# Altium PCB Node Controller v2.PcbDoc
Units mm, origin at the board's own origin, x right, y up, seen from the top; angles counter-clockwise.
Board outline 55 x 37 mm, 2 copper layers (Top Layer, Bottom Layer); 38 components, 27 nets, 150 pads, 137 vias.
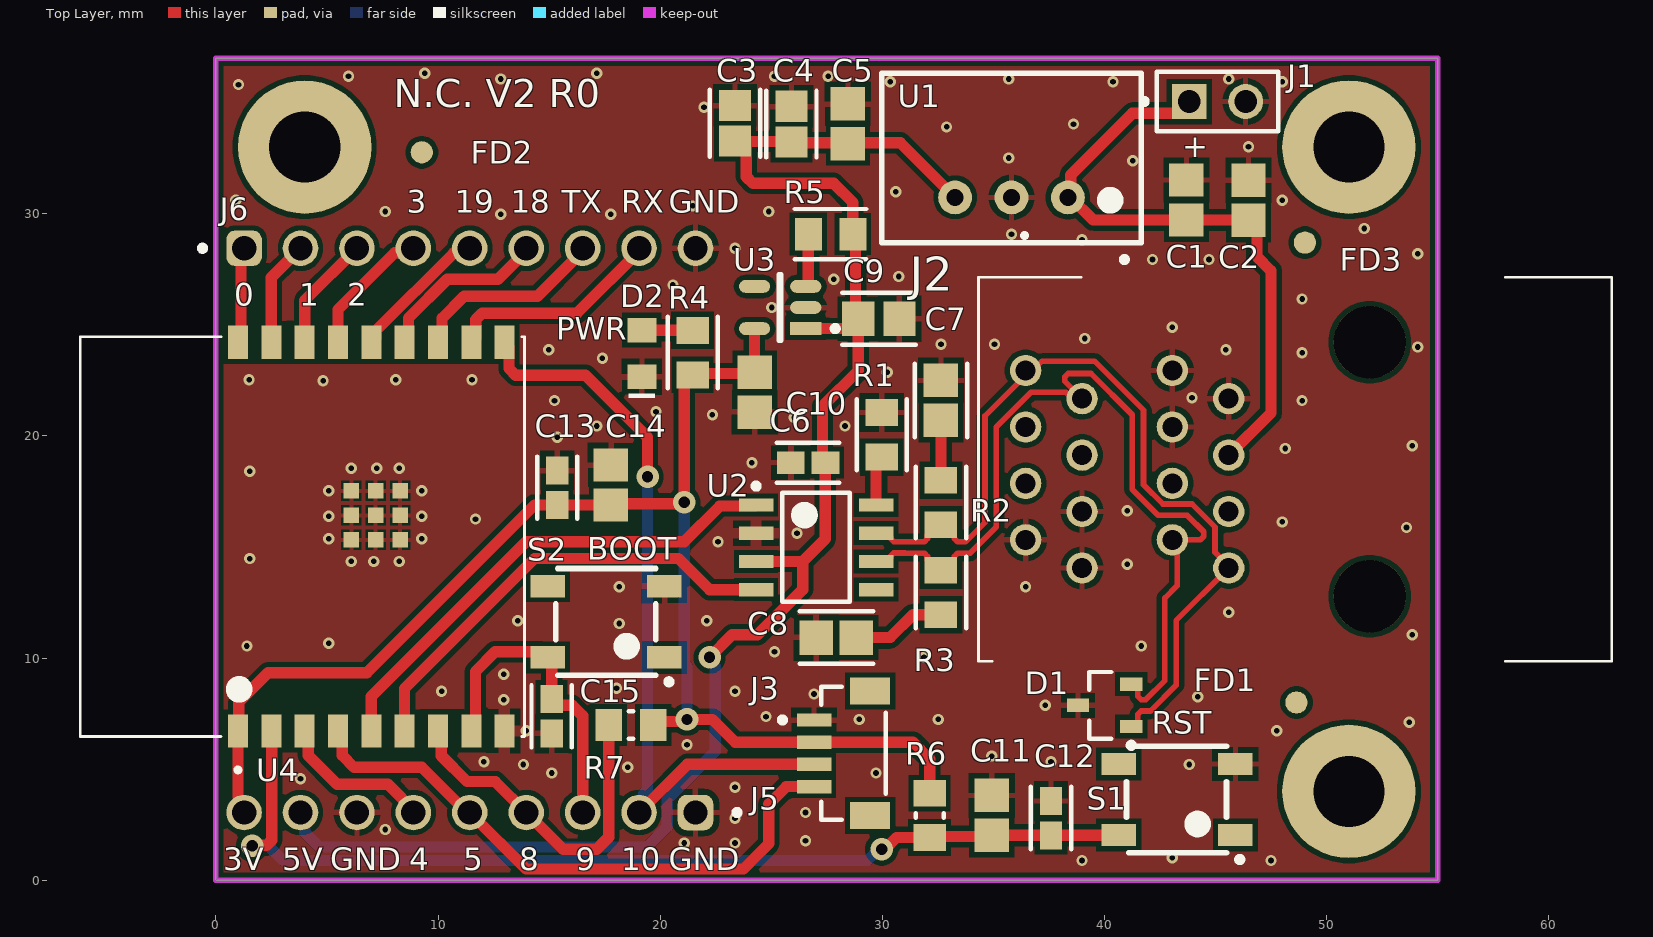
[diagram p0: Top Layer view]
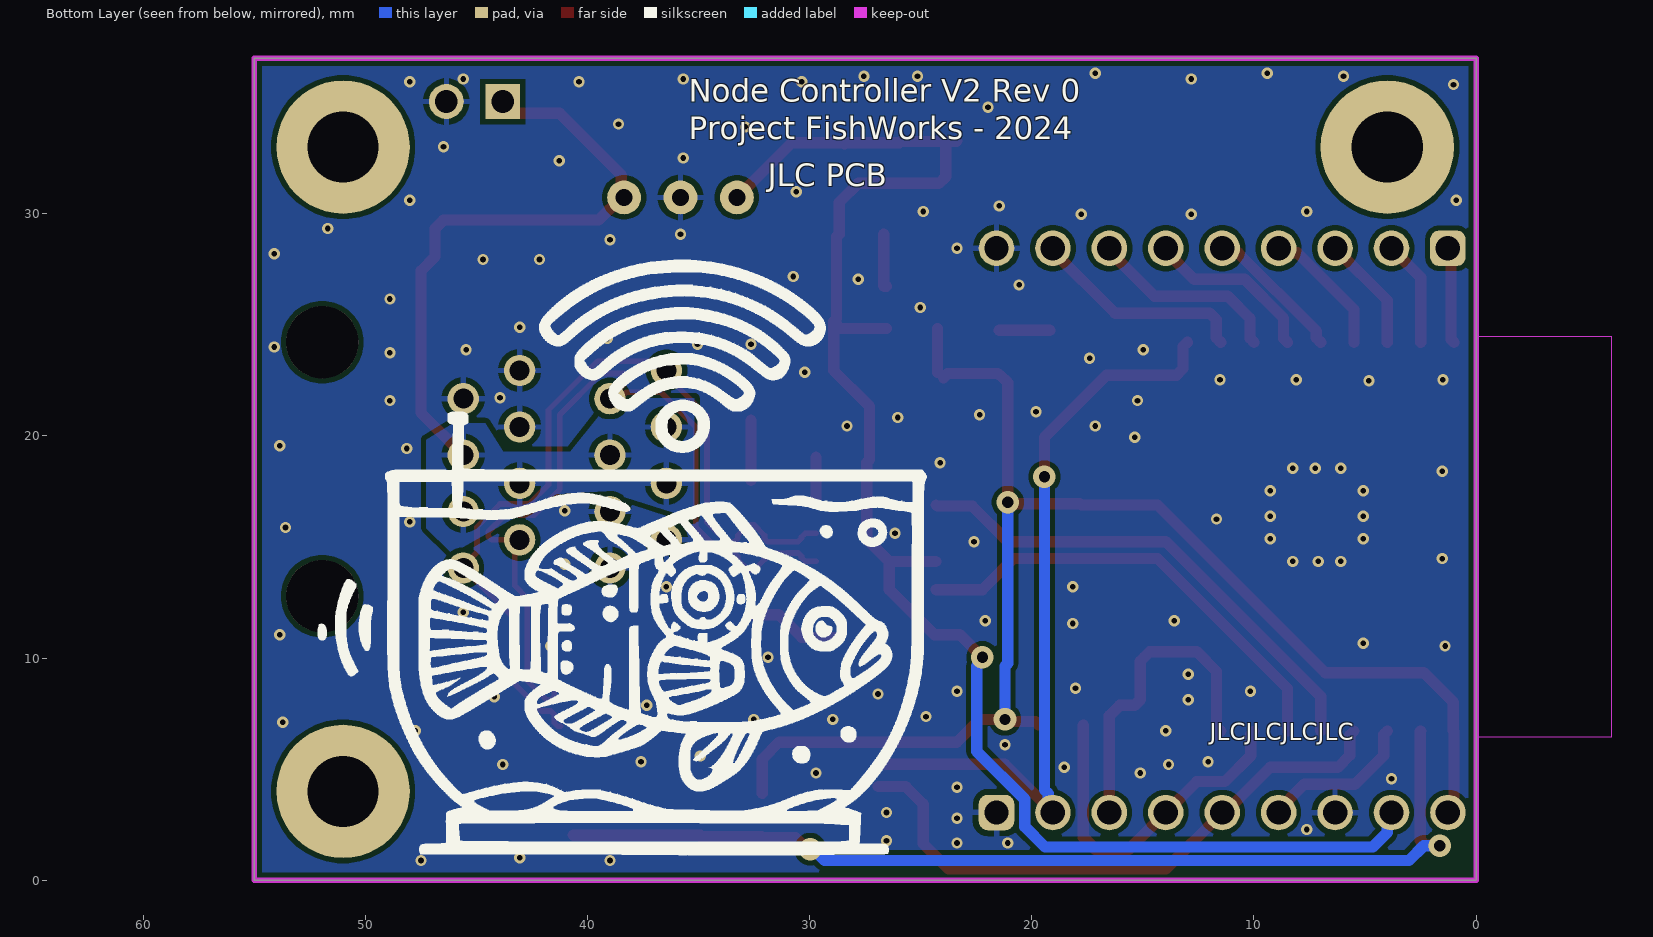
[diagram p1: Bottom Layer view, seen from below]
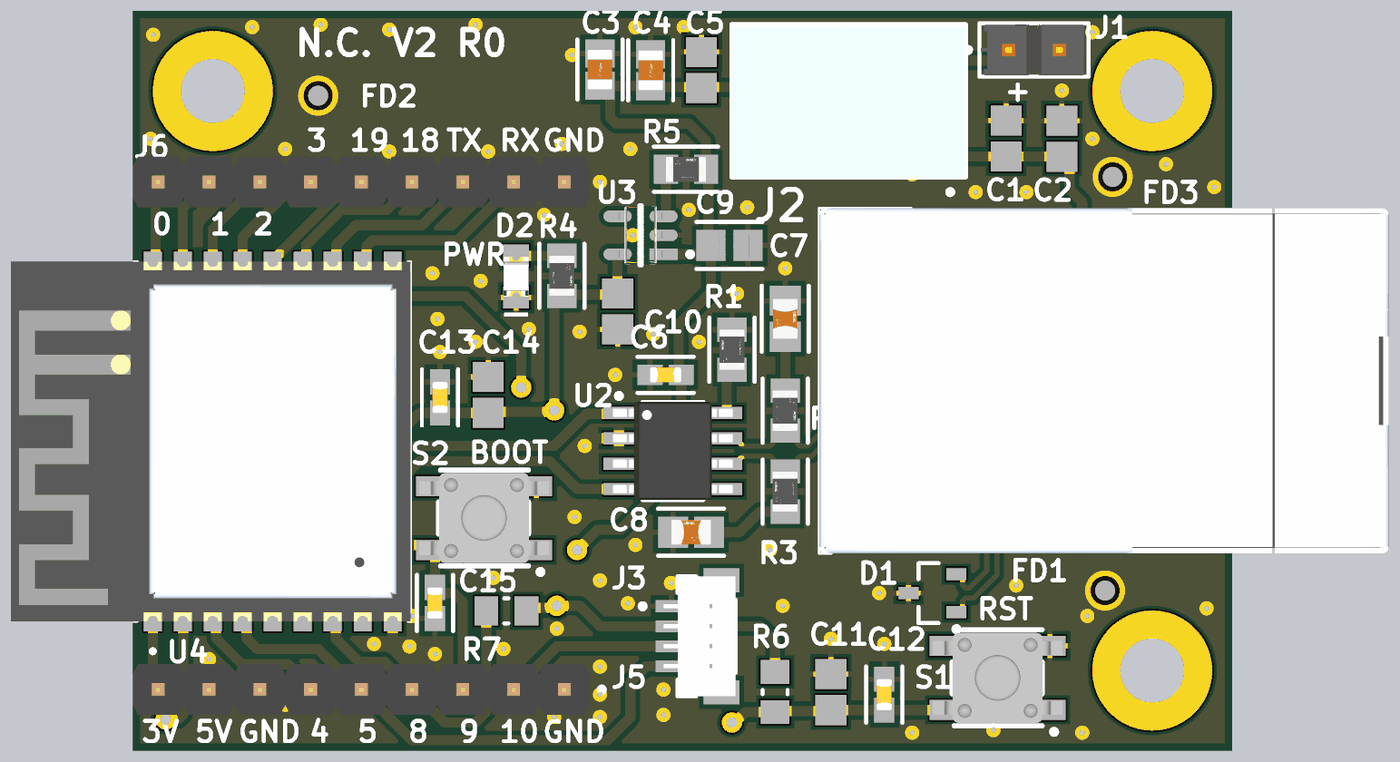
[diagram p2: 3D render of the assembled board from above, using the file's embedded part models]

## Layer stack, top to bottom
Top Solder: solder mask 0.0102, Solder Resist, Dk 3.5
Top Layer: signal copper 0.0356
Dielectric 1: dielectric 0.32, FR-4, Dk 4.8
Bottom Layer: signal copper 0.0356
Bottom Solder: solder mask 0.0102, Solder Resist, Dk 3.5

## Board outline
0,0 0,37 55,37 55,0

## Design rules (kind name [scope] priority, off if disabled: settings)
BoardOutlineClearance [All] p1: gap=0.254 ignorepadtopadclearanceinfootprint=FALSE except(0: Arc-SplitContinuation Track-SplitContinuation SMDPad-SplitContinuation THPad-SplitContinuation Via-SplitContinuation Fill-SplitContinuation Poly-SplitContinuation Region-SplitContinuation Text-SplitContinuation)
Clearance Clearance(DifferentNetOnly) [All] p1: gap=0.229 ignorepadtopadclearanceinfootprint=TRUE except(0.1: Arc-SMDPad Arc-THPad Track-SMDPad Track-THPad; 0.102: Arc-Arc Arc-Track Track-Track; 0.15: SMDPad-SMDPad; 0.28: Arc-Via Arc-Hole Track-Via Track-Hole)
DiffPairsRouting [All] p1: maxlimit=0.762 minlimit=0.178 mostfreqgap=0.254 toplayer_minwidth=0.254 toplayer_maxwidth=0.508 toplayer_prefwidth=0.254 bottomlayer_minwidth=0.254 bottomlayer_maxwidth=0.508 bottomlayer_prefwidth=0.254 maxuncoupledlength=12.7
HoleSize [All] p1: absolutevalues=TRUE maxlimit=6.3 minlimit=0.15 maxpercent=80.000 minpercent=20.000
MinimumSolderMaskSliver [All] p1: minsoldermaskwidth=0.1
PlaneClearance [All] p1: clearance=0.229
PlaneConnect [All] p1: planeconnectstyle=Relief reliefexpansion=0.254 reliefentries=4 reliefconductorwidth=0.254 reliefairgap=0.254
PolygonConnect PolygonConnect_ESP32 [HasFootprint('ESP32-C3-WROOM-02')] p1: thpad.connectstyle=Relief thpad.reliefconductorwidth=0.254 thpad.reliefentries=4 thpad.polygonreliefangle="90 Angle" thpad.airgapwidth=0.254 smdpad.connectstyle=Relief smdpad.reliefconductorwidth=0.203 smdpad.reliefentries=4 smdpad.polygonreliefangle="90 Angle" smdpad.airgapwidth=0.102 via.connectstyle=Relief via.reliefconductorwidth=0.254 via.reliefentries=4 via.polygonreliefangle="90 Angle" via.airgapwidth=0.254
PolygonConnect [All] p2: connectstyle=Relief reliefconductorwidth=0.254 reliefentries=4 polygonreliefangle="90 Angle" airgapwidth=0.254
RoutingVias [All] p1: holewidth=0.508 width=1.016 viastyle="Through Hole" minholewidth=0.254 minwidth=0.508 maxholewidth=0.508 maxwidth=1.016
SolderMaskExpansion [All] p1: expansion=0.102 istentingtop=FALSE
SupplyNets "Schematic Supply Nets_3" [InNet('GND')] p1: voltage=0.000
SupplyNets "Schematic Supply Nets_2" [InNet('+24V')] p2: voltage=0.000
SupplyNets "Schematic Supply Nets_1" [InNet('+5.0V')] p3: voltage=0.000
SupplyNets "Schematic Supply Nets" [InNet('+3.3V')] p4: voltage=0.000
Width [All] p1: maxlimit=4.064 minlimit=0.102 preferedwidth=0.508 minimp=50.000000 maximp=50.000000 favimp=50.000000
25 further rules are at their usual default settings.

## Classes and differential pairs
differential pair CAN: +CAN_P -CAN_N

## Components (designator, comment, footprint, x,y, rotation, side; value= is the part's Value field where it differs from the comment)
C1 "10uF" CAPC2013X145X50ML20T25 43.688,30.618 r270 top
C2 "10uF" CAPC2013X145X50ML20T25 46.482,30.607 r270 top
C3 "22uF" FP-GMC21R-IPC_B 23.368,34.074 r90 top
C4 "22uF" FP-GMC21R-IPC_B 25.908,34.036 r90 top
C5 "10uF" CAPC2013X145X50ML20T25 28.448,34.047 r270 top
C6 "0.1uF" FP-CC0603-DA-IPC_A 26.655,18.796 r180 top value=100nF
C7 "560pF" FP-CC0805-0_85-IPC_A 32.639,21.602 r90 top
C8 "560pF" FP-CC0805-0_85-IPC_A 27.928,10.922 r180 top
C9 "1uF" FP-CL21-IPC_A 29.845,25.273 r0 top value=1µF
C10 "10uF" CAPC2013X145X50ML20T25 24.257,21.971 r90 top
C11 "10uF" CAPC2013X145X50ML20T25 34.925,2.921 r270 top
C12 "0.1uF" FP-CC0603-DA-IPC_A 37.592,2.794 r270 top value=100nF
C13 "0.1uF" FP-CC0603-DA-IPC_A 15.367,17.668 r270 top value=100nF
C14 "10uF" CAPC2013X145X50ML20T25 17.78,17.791 r270 top
C15 "0.1uF" FP-CC0603-DA-IPC_A 15.113,7.381 r90 top value=100nF
D1 "DESD1CAN2SOQ-7" SOT95P245X110-3N 40.005,7.874 r180 top
D2 "150080VS75000" WL-SMCW_0805_150080xx75000 19.177,23.715 r90 top
FD1 "JLC FID1X2R" FID1X2R#1 48.641,8.001 r90 top
FD2 "JLC FID1X2R" FID1X2R#2 9.271,33.401 r90 top
FD3 "JLC FID1X2R" FID1X2R#3 49.022,28.702 r90 top
J1 "TSW-102-07-G-S" FP-TSW-102-07-G-S-MFG 45.085,35.052 r0 top
J2 "E5908-0T0343-L" E5908-0T0343-L-Footprint-1 51.943,18.5 r90 top
J3 "BM04B-SRSS-TBT(LF)(SN)" FP-BM04B-SRSS-TBT_LF_SN-MFG 28.702,5.715 r270 top
J5 "61300911121" 61300911121 11.43,3.048 r180 top
J6 "61300911121" 61300911121 11.43,28.448 r0 top
R1 "4.7k" FP-RT0805-IPC_A 29.972,20.052 r90 top value=4.7kR
R2 "100" FP-RT0805-0_6-IPC_A 32.639,17.004 r270 top value=100R
R3 "100" FP-RT0805-0_6-IPC_A 32.639,12.954 r90 top value=100R
R4 "1.5k" FP-RT0805-IPC_A 21.463,23.749 r270 top value=1.5kR
R5 "100k" FP-RT0805-IPC_A 27.672,29.083 r0 top value=100kR
R6 "10k" RESC2013X60X35ML10T20 32.131,2.921 r90 top value=10kR
R7 "10k" RESC2013X60X35ML10T20 18.685,6.985 r0 top value=10kR
S1 "PTS647SN50SMTR2LFS" PTS647SN50SMTR2LFS-Footprint-1 45.89,2.032 r180 top
S2 "PTS647SN50SMTR2LFS" PTS647SN50SMTR2LFS-Footprint-1 20.193,10.033 r180 top
U1 "TR10S05" TR10S05-Footprint-1 38.354,30.734 r180 top
U2 "MCP2551-I/SN" MCHP-SN8_V 27.018,14.986 r0 top
U3 "AP2112K-3.3TRG1" FP-SOT25-IPC_B 25.4,25.781 r180 top
U4 "ESP32-C3-WROOM-02" ESP32-C3-WROOM-02 0.996,6.716 r90 top

## Footprints (in the part's own frame and the unit in brackets; to place one, negate y for a bottom-side part, rotate by r counter-clockwise, add the part's x,y. Pads: shape width x height; smd on the part's side, far side on the other; paste and mask are expansions set on the pad)
61300911121 [mm] "Pin Header, pitch 2.54 mm, THT, Vertical, single row, 9p"
  rrect50% 1.6x1.6 hole 1.1: 1(-10.16,0)
  round 1.6 hole 1.1: 2(-7.62,0) 3(-5.08,0) 4(-2.54,0) 5(0,0) 6(2.54,0) 7(5.08,0) 8(7.62,0) 9(10.16,0)
  silkscreen extent -12.15,-0.12 -11.91,0.12, body extent -11.43,-1.27 11.43,1.27, height 8.57
CAPC2013X145X50ML20T25 [mm] "Chip Capacitor, 2-Leads, Body 2.00x1.25mm, IPC Low Density"
  rect 1.5x1.55 smd: 1(-0.9,0) 2(0.9,0)
  body extent -1.1,-0.72 1.1,0.72, height 1.45
E5908-0T0343-L-Footprint-1 [mm]
  round 1.408 hole 0.9: 1B(-4.445,6.35) 1T(4.445,15.49) 2B(-3.175,8.89) 2T(3.175,12.95) 3B(-1.905,6.35) 3T(1.905,15.49) 4B(-0.635,8.89) 4T(0.635,12.95) 5B(0.635,6.35) 5T(-0.635,15.49) 6B(1.905,8.89) 6T(-1.905,12.95) 7B(3.175,6.35) 7T(-3.175,15.49) 8B(4.445,8.89) 8T(-4.445,12.95)
  round 3.25 hole 3.25 unplated: ""(-5.715,0) ""(5.715,0)
  silkscreen extent -8.64,-10.89 10.62,17.61, body extent -8.64,-10.89 8.64,17.61, height 25.3
ESP32-C3-WROOM-02 [mm]
  rect 1.5x0.9 smd: 1(0,0) 2(0,-1.5) 3(0,-3) 4(0,-4.5) 5(0,-6) 6(0,-7.5) 7(0,-9) 8(0,-10.5) 9(0,-12) 10(17.5,-12) 11(17.5,-10.5) 12(17.5,-9) 13(17.5,-7.5) 14(17.5,-6) 15(17.5,-4.5) 16(17.5,-3) 17(17.5,-1.5) 18(17.5,0)
  rect 0.7x0.7 smd: 19(8.61,-7.3) 19(8.61,-6.2) 19(8.61,-5.1) 19(9.71,-7.3) 19(9.71,-6.2) 19(9.71,-5.1) 19(10.81,-7.3) 19(10.81,-6.2) 19(10.81,-5.1)
  Keep-Out Layer region: 17.75,1.1 -0.25,1.1 -0.25,7.1 17.75,7.1
  Keep-Out Layer region: 17.75,1.1 -0.25,1.1 -0.25,7.1 17.75,7.1
  silkscreen extent -1.85,-12.9 17.75,7.1, body extent -0.25,-12.9 17.75,7.1, height 3.35
FID1X2R#1 [mm] "Fiducial - Round 1x2mm"
  round 1 smd mask-2539.97: 0(0,0)
FID1X2R#2 [mm] "Fiducial - Round 1x2mm"
  round 1 smd mask-2539.97: 0(-0.635,0)
FID1X2R#3 [mm] "Fiducial - Round 1x2mm"
  round 1 smd mask-2539.97: ""(0,0)
FP-BM04B-SRSS-TBT_LF_SN-MFG [mm]
  rect 0.6x1.55 smd paste+0 mask+0: 1(-1.5,-1.775) 2(-0.5,-1.775) 3(0.5,-1.775) 4(1.5,-1.775)
  rect 1.2x1.8 smd paste+0 mask+0: 5(-2.8,0.75) 6(2.8,0.75)
  silkscreen extent -3,-3.32 3,1.45, body extent -3.5,-2.65 3.5,1.75, height 0.25
FP-CC0603-DA-IPC_A [mm]
  rect 1.258x1.012 smd paste+0 mask+0: 1(-0.777,0) 2(0.777,0)
  silkscreen extent -1.41,-0.91 1.41,0.91, body extent -1.91,-1.01 1.91,1.01, height 0.25
FP-CC0805-0_85-IPC_A [mm]
  rect 1.505x1.556 smd paste+0 mask+0: 1(-0.901,0) 2(0.901,0)
  silkscreen extent -1.65,-1.18 1.65,1.18, body extent -2.15,-1.28 2.15,1.28, height 0.25
FP-CL21-IPC_A [mm]
  rect 1.455x1.556 smd paste+0 mask+0: 1(-0.926,0) 2(0.926,0)
  silkscreen extent -1.65,-1.18 1.65,1.18, body extent -2.15,-1.28 2.15,1.28, height 0.25
FP-GMC21R-IPC_B [mm]
  rect 1.403x1.456 smd paste+0 mask+0: 1(-0.8,0) 2(0.8,0)
  silkscreen extent -1.5,-1.13 1.5,1.13, body extent -1.75,-0.98 1.75,0.98, height 0.25
FP-RT0805-0_6-IPC_A [mm]
  rect 1.208x1.462 smd paste+0 mask+0: 1(-1.002,0) 2(1.002,0)
  silkscreen extent -1.61,-1.13 1.61,1.13, body extent -2.11,-1.23 2.11,1.23, height 0.25
FP-RT0805-IPC_A [mm]
  rect 1.208x1.462 smd paste+0 mask+0: 1(-1.002,0) 2(1.002,0)
  silkscreen extent -1.61,-1.13 1.61,1.13, body extent -2.11,-1.23 2.11,1.23, height 0.25
FP-SOT25-IPC_B [mm]
  rect 1.407x0.576 smd paste+0 mask+0: 1(-1.151,0.95)
  rrect100% 1.407x0.576 smd paste+0 mask+0: 2(-1.151,0) 3(-1.151,-0.95) 4(1.151,-0.95) 5(1.151,0.95)
  silkscreen extent -2.6,-1.5 0.05,1.5, body extent -2.1,-1.75 2.1,1.75, height 0.25
FP-TSW-102-07-G-S-MFG [mm]
  rect 1.57x1.57 hole 1.02 paste-2539.97 mask+0: 1(-1.27,0)
  round 1.57 hole 1.02 paste-2539.97 mask+0: 2(1.27,0)
  silkscreen extent -3.42,-1.34 2.73,1.34, body extent -2.83,-1.44 2.83,1.44, height 0.25
MCHP-SN8_V [mm] "SOIC, 8-Leads, Body 4.9x3.9mm, Pitch 1.27mm"
  rect 1.55x0.6 smd: 1(-2.7,1.905) 2(-2.7,0.635) 3(-2.7,-0.635) 4(-2.7,-1.905) 5(2.7,-1.905) 6(2.7,-0.635) 7(2.7,0.635) 8(2.7,1.905)
  silkscreen extent -2.82,-2.45 1.53,2.88, body extent -3,-2.45 3,2.45, height 1.75
PTS647SN50SMTR2LFS-Footprint-1 [mm]
  rect 1.55x1 smd: 1(0,0) 2(5.25,0) 3(0,-3.2) 4(5.25,-3.2)
  silkscreen extent -0.33,-4 4.9,1.22, body extent -0.63,-3.85 5.88,0.65, height 5
RESC2013X60X35ML10T20 [mm] "Chip Resistor, 2-Leads, Body 2.00x1.25mm, IPC Low Density"
  rect 1.2x1.45 smd: 1(-1,0) 2(1,0)
  silkscreen extent -0.1,-0.62 0.1,0.62, body extent -1.05,-0.67 1.05,0.67, height 0.6
SOT95P245X110-3N [mm] "SOT23, 3-Leads, Body 2.90x2.45mm, Pitch 0.95mm, IPC Medium Density"
  rect 1x0.6 smd: 1(-1.2,0.95) 2(-1.2,-0.95) 3(1.2,0)
  silkscreen extent -1.33,-1.5 0.7,1.92, body extent -0.7,-1.5 0.7,1.5, height 1.1
TR10S05-Footprint-1 [mil]
  round 60 hole 30: 1(0,0) 2(100,0) 3(200,0)
  silkscreen extent -130,-220 330,115, body extent -130,-215 330,80, height 400
WL-SMCW_0805_150080xx75000 [mm] "SMD Mono-color Chip LED, body 2.0x1.25mm"
  rect 1.1x1.3 smd: 1(-1.05,0) 2(1.05,0)
  silkscreen extent -2,-0.6 -1.8,0.6, body extent -1,-0.63 1,0.62, height 0.7

## Part data
C1 C2 C5 C10 C11 C14: library part CMP-00010-1, "Ceramic Capacitor, Multilayer, Ceramic, 10V, 80% +Tol, 20% -Tol, Y5V, -82/+22% TC, 10uF, Surface Mount, 0805", Capacitor Type=Ceramic, Case/Package=0805, Max Operating Temperature=85°C, Min Operating Temperature=-30°C, Package Shape=Rectangular, Package Style=SMTMeter, Rated DC Voltage (URdc)=10V, Temperature Characteristics Code=Y5V, Tolerance  (fill in as +-)=20%, Tolerance (fill in as +-)=80%, Dielectric Material=Ceramic, Height=1.25mm, JESD-609 Code=e3, Length=2mm, Mounting Technology="Surface Mount", Multilayer=Yes, Packaging="Tape and Reel", Pins=2, Reach SVHC Compliant=Yes, RoHS Compliant=Yes, Terminal Finish=Nickel, Termination=Wraparound, Width=1.25mm
C3 C4: library part CMP-00027-1, "Ceramic Capacitor, Multilayer, Ceramic, 35V, 20% +Tol, 20% -Tol, X5R, 15% TC, 22uF, Surface Mount, 0805"
C6 C12 C13 C15: library part CMP-00002-1, "Ceramic Capacitor, Multilayer, Ceramic, 50V, 10% +Tol, 10% -Tol, X7R, 15% TC, 0.1uF, Surface Mount, 0603", Capacitor Type=Ceramic, Case/Package=0603, Max Operating Temperature=125°C, Min Operating Temperature=-55°C, Package Shape=Rectangular, Package Style=SMTMeter, Rated DC Voltage (URdc)=50V, Temperature Characteristics Code=X7R, Tolerance  (fill in as +-)=10%, Dielectric Material=Ceramic, Height=0.8mm, JESD-609 Code=e3, Length=1.6mm, Mounting Technology="Surface Mount", Multilayer=Yes, Packaging="Tape and Reel", Pins=2, Reach SVHC Compliant=Yes, RoHS Compliant=Yes, Terminal Finish=Nickel, Termination=Wraparound, Tolerance (fill in as +-)=10%, Width=0.8mm
C7 C8: library part CMP-00033-1, "Ceramic Capacitor, Multilayer, Ceramic, 50V, 10% +Tol, 10% -Tol, X7R, 15% TC, 0.00056uF, Surface Mount, 0805", Capacitor Type=Ceramic, Case/Package=0805, Max Operating Temperature=125°C, Min Operating Temperature=-55°C, Package Shape=Rectangular, Rated DC Voltage (URdc)=50V, Temperature Characteristics Code=X7R, Tolerance  (fill in as +-)=10%, Dielectric Material=Ceramic, JESD-609 Code=e3, Mounting Technology="Surface Mount", Multilayer=Yes, Packaging="Tape and Reel", Pins=2, Reach SVHC Compliant=Yes, RoHS Compliant=Yes, Terminal Finish=Nickel, Termination=Wraparound, Tolerance (fill in as +-)=10%
C9: library part CMP-00019-1, "Ceramic Capacitor, Multilayer, Ceramic, 50V, 10% +Tol, 10% -Tol, X7R, 15% TC, 1uF, Surface Mount, 0805", Capacitor Type=Ceramic, Case/Package=0805, Max Operating Temperature=125°C, Min Operating Temperature=-55°C, Package Shape=Rectangular, Package Style=SMTMeter, Rated DC Voltage (URdc)=50V, Temperature Characteristics Code=X7R, Tolerance  (fill in as +-)=10%, Dielectric Material=Ceramic, Height=1.35mm, JESD-609 Code=e3, Length=2mm, Mounting Technology="Surface Mount", Multilayer=Yes, Packaging="Tape and Reel", Pins=2, Reach SVHC Compliant=Yes, RoHS Compliant=Yes, Terminal Finish=Nickel, Termination=Wraparound, Tolerance (fill in as +-)=10%, Width=1.25mm
D1: library part CMP-00024-2, "Trans Voltage Suppressor Diode, 200W, 24V V(RWM), Bidirectional, 2 Element, Silicon", Max Breakdown Voltage=30.3V, Max Operating Temperature=150°C, Max Power Dissipation=300mW, Min Breakdown Voltage=25.4V, Min Operating Temperature=-65°C, Non-rep Peak Rev Power Dis-Max=200W, Package Body Material=Plastic, Package Shape=Rectangular, Package Style="SMALL OUTLINEMeter", Peak Reflow Temperature (Cel)=260°C, Rep Pk Reverse Voltage-Max=24V, Time @ Peak Reflow Temperature-Max (s)=30s, Additional Feature="HIGH RELIABILITY", Diode Element Material=SILICON, Diode Type="TRANS VOLTAGE SUPPRESSOR", JESD-30 Code=R-PDSO-G3, JESD-609 Code=e3, Moisture Sensitivity Level=1, Number of Elements=2, Pins=3, Polarity=Bidirectional, Reach SVHC Compliant=Yes, Reference Standard=AEC-Q101, RoHS Compliant=Yes, Surface Mount=Yes, Technology=AVALANCHE, Terminal Finish=Tin, Terminal Form="Gull Wing", Terminal Position=DUAL
D2: library part CMP-00021-1, "Single Color LED, Bright Green, Water Clear, 1.4mm", Color=Green, Forward Current=30mA, Max Operating Temperature=85°C, Min Operating Temperature=-40°C, Channels=1, Lens Style="WATER CLEAR", Luminous Intensity-Nom=40mcd, Mounting Technology="Surface Mount", Optoelectronic Device Type="SINGLE COLOR LED", Overall Height=0.7mm, Packaging="Tape and Reel", Pins=2, Reach SVHC Compliant=Yes, RoHS Compliant=Yes, Shape=Rectangular, Size=1.4mm, Terminal Pitch=2.1mm, Viewing Angle=140°
FD1 FD2 FD3: library part CMP-00028-00011-4, "Fiducial - Round 1x2mm", Pins=0
J1: library part CMP-00020-2, "Board Connector, 2 Contact(s), 1 Row(s), Male, Straight, 0.1 inch Pitch, Solder Terminal, Black Insulator", Flammability Rating="UL94 V-0", Insulation Color=Black, Additional Feature=E.L.P., Body Breadth=0.1inch, Body Depth=0.1inch, Body/Shell Style=RECEPTACLE, Connector Type="BOARD CONNECTOR", Contact Finish - Mating="GOLD (10) OVER NICKEL (50)", Contact Finish - Termination="Gold (Au) - with Nickel (Ni) barrier", Contact Gender=Male, Contact Material=Bronze, Contact Pattern=RECTANGULAR, Contact Style="SQ PIN-SKT", DIN Conformance=No, Filter Feature=No, IEC Conformance=No, Insulation Material=Glass, JESD-609 Code=e4, Mating Contact Pitch=0.1inch, Mating Information="MULTIPLE MATING PARTS AVAILABLE", MIL Conformance=No, Mixed Contacts=No, Mounting Style=STRAIGHT, Mounting Technology=Board, Number Of Connectors=1, Number of Contacts=2, Number Of PCB Rows=1, Number of Rows Loaded=1, Option="General Purpose", PCB Contact Pattern=RECTANGULAR, Plating Thickness=10uin, Reach SVHC Compliant=Yes, Reference Standard=UL, Reliability=COMMERCIAL, RoHS Compliant=Yes, Terminal Length=0.1inch, Terminal Pitch=2.54mm, Termination=Solder
J2: library part CMP-002-00077-7, "Telecom and Datacom Connector, 16 Contact(s), Female, Right Angle, Solder Terminal, Jack", Flammability Rating="UL94 V-0", Manufacturer Series=E5908, Body/Shell Style=JACK, Connector Type="TELECOM AND DATACOM CONNECTOR", Contact Finish - Mating="GOLD (15) OVER NICKEL", Contact Finish - Termination="GOLD (15) OVER NICKEL", Contact Gender=Female, DIN Conformance=No, Empty Shell=No, Filter Feature=No, IEC Conformance=No, Insulation Material=Glass, JESD-609 Code=e4, MIL Conformance=No, Mixed Contacts=No, Mounting Style="RIGHT ANGLE", Mounting Technology=Board, Number of Contacts=16, Option="General Purpose", Reach SVHC Compliant=Yes, RoHS Compliant=Yes, Shell Material=Glass, Termination=Solder
J3: library part CMP-002-00076-4, "1.0mm Pitch, Ultra-Compact, Low Profile Design, Interchangeable Shrouded Header"
J5 J6: library part CMP-00023-4, "Board Connector, 9 Contact(s), 1 Row(s), Male, Straight, 0.1 inch Pitch, Solder Terminal, Locking, Black Insulator, Plug", Contact Resistance=20mR, Dielectric Withstanding Voltage (AC)=500V, Insulation Color=Black, Insulation Resistance=1GR, Max Operating Temperature=125°C, Min Operating Temperature=-40°C, Rated Current (Signal)=3A, Body Breadth=0.1inch, Body Depth=0.1inch, Body Length=0.9inch, Body/Shell Style=PLUG, Connector Type="BOARD CONNECTOR", Contact Finish - Mating=GOLD, Contact Finish - Termination="Gold (Au) - with Nickel (Ni) barrier", Contact Gender=Male, Contact Material="Copper Alloy", Contact Pattern=RECTANGULAR, Contact Style="SQ PIN-SKT", Insulation Material=Polybutylene, JESD-609 Code=e4, Mating Contact Pitch=0.1inch, Mounting Option 1=LOCKING, Mounting Style=STRAIGHT, Mounting Technology=Board, Number Of Connectors=1, Number of Contacts=9, Number of Rows Loaded=1, PCB Contact Pattern=RECTANGULAR, Reach SVHC Compliant=Yes, Reference Standard=UL, Reliability=COMMERCIAL, RoHS Compliant=Yes, Terminal Length=0.118inch, Terminal Pitch=2.54mm, Termination=Solder
R1: library part CMP-00015-1, "Fixed Resistor, Thin Film, 0.125W, 4700ohm, 150V, 1% +/-Tol, 50ppm/Cel, Surface Mount, 0805", Case/Package=0805, Max Operating Temperature=155°C, Min Operating Temperature=-55°C, Package Height=0.5mm, Package Length=2mm, Package Style=SMTMeter, Package Width=1.25mm, Power=125mW, Rated Temperature=70°C, Resistor Type="FIXED RESISTOR", Temperature Coefficient=50ppm/°C, Tolerance=1%, Working Voltage=150V, Additional Feature="HIGH PRECISION", Construction=Chip, Mounting Technology="Surface Mount", Packaging="Tape and Reel", Pins=2, Reach SVHC Compliant=Yes, RoHS Compliant=Yes, Technology="THIN FILM", Termination=Wraparound
R2 R3: library part CMP-00016-1, "Fixed Resistor, Thin Film, 0.125W, 100ohm, 150V, 0.1% +/-Tol, 25ppm/Cel, Surface Mount, 0805", Case/Package=0805, Max Operating Temperature=155°C, Min Operating Temperature=-55°C, Package Height=0.5mm, Package Length=2mm, Package Style=SMTMeter, Package Width=1.25mm, Power=125mW, Rated Temperature=70°C, Resistor Type="FIXED RESISTOR", Temperature Coefficient=25ppm/°C, Tolerance=0.1%, Working Voltage=150V, Additional Feature="HIGH PRECISION", Construction=Chip, Mounting Technology="Surface Mount", Packaging="Tape and Reel", Pins=2, Reach SVHC Compliant=Yes, RoHS Compliant=Yes, Technology="THIN FILM", Termination=Wraparound
R4: library part CMP-00013-1, "Fixed Resistor, Thin Film, 0.125W, 1500ohm, 150V, 1% +/-Tol, 50ppm/Cel, Surface Mount, 0805", Case/Package=0805, Max Operating Temperature=155°C, Min Operating Temperature=-55°C, Package Height=0.5mm, Package Length=2mm, Package Style=SMTMeter, Package Width=1.25mm, Power=125mW, Rated Temperature=70°C, Resistor Type="FIXED RESISTOR", Temperature Coefficient=50ppm/°C, Tolerance=1%, Working Voltage=150V, Additional Feature="HIGH PRECISION", Construction=Chip, Mounting Technology="Surface Mount", Packaging="Tape and Reel", Pins=2, Reach SVHC Compliant=Yes, RoHS Compliant=Yes, Technology="THIN FILM", Termination=Wraparound
R5: library part CMP-00014-1, "Fixed Resistor, Thin Film, 0.125W, 100000ohm, 150V, 1% +/-Tol, 50ppm/Cel, Surface Mount, 0805", Case/Package=0805, Max Operating Temperature=155°C, Min Operating Temperature=-55°C, Package Height=0.5mm, Package Length=2mm, Package Style=SMTMeter, Package Width=1.25mm, Power=125mW, Rated Temperature=70°C, Resistor Type="FIXED RESISTOR", Temperature Coefficient=50ppm/°C, Tolerance=1%, Working Voltage=150V, Additional Feature="HIGH PRECISION", Construction=Chip, Mounting Technology="Surface Mount", Packaging="Tape and Reel", Pins=2, Reach SVHC Compliant=Yes, RoHS Compliant=Yes, Technology="THIN FILM", Termination=Wraparound
R6 R7: library part CMP-00012-1, "Fixed Resistor, Metal Glaze/thick Film, 0.125W, 10000ohm, 150V, 1% +/-Tol, 100ppm/Cel, Surface Mount, 0805", Case/Package=0805, Max Operating Temperature=155°C, Min Operating Temperature=-55°C, Package Height=0.5mm, Package Length=2mm, Package Shape=Rectangular, Package Style=SMTMeter, Package Width=1.25mm, Power=125mW, Rated Temperature=70°C, Resistor Type="FIXED RESISTOR", Temperature Coefficient=100ppm/°C, Tolerance=1%, Working Voltage=150V, Additional Feature="LASER TRIMMABLE", Construction=Chip, JESD-609 Code=e3, Mounting Technology="Surface Mount", Packaging="Tape and Reel", Pins=2, Reach SVHC Compliant=Yes, RoHS Compliant=Yes, Technology="METAL GLAZE/THICK FILM", Terminal Finish=Nickel, Termination=Wraparound
S1 S2: library part CMP-011-00013-3, "Keypad Switch, 1 Switches, SPST, Momentary-tactile, 0.05A, 12VDC, 1.47N, Solder Terminal, Surface Mount-straight", RoHS Compliant=Yes
U1: library part CMP-019-00050-2, "DC-DC Regulated Power Supply Module", Reach SVHC Compliant=Yes, RoHS Compliant=Yes, Throw Configuration="DC-DC REGULATED POWER SUPPLY MODULE"
U2: library part CMP-015-00008-2, "CAN Transceiver, 1-Trnsvr, PDSO8", Case/Package=SOP, Max Operating Temperature=85°C, Max Supply Current=75uA, Min Operating Temperature=-40°C, Nominal Supply Voltage=5V, Package Body Material=Plastic, Package Equivalence Code=SOP8,.25, Package Shape=Rectangular, Package Style="SMALL OUTLINEMeter", Peak Reflow Temperature (Cel)=260°C, Temperature Grade=INDUSTRIAL, Time @ Peak Reflow Temperature-Max (s)=40s, Channels=1, Data Rate=1000Mbps, Height - Seated (Max)=1.75mm, JESD-30 Code=R-PDSO-G8, JESD-609 Code=e3, Length=4.9mm, Moisture Sensitivity Level=1, Number of Transceivers=1, Pins=8, Power Supplies=5V, Qualification Status="Not Qualified", Reach SVHC Compliant=Yes, RoHS Compliant=Yes, Surface Mount=Yes, Technology=CMOS, Telecom IC Type="INTERFACE CIRCUIT", Terminal Finish=Tin, Terminal Form="Gull Wing", Terminal Pitch=1.27mm, Terminal Position=DUAL, Width=3.9mm
U3: library part CMP-019-00049-4, "Fixed Positive LDO Regulator, 3.3V, 0.4V Dropout, CMOS, PDSO5", Case/Package=LSSOP, Max Operating Temperature=85°C, Max Supply Voltage=6V, Min Operating Temperature=-40°C, Pins=5, RoHS Compliant=Yes
U4: library part CMP-005-00015-5, Datasheet=https://www.espressif.com/sites/default/files/documentation/esp32-c3-wroom-02_datasheet_en.pdf, Design Item ID=ESP32-C3-WROOM-02, ki_description="ESP32-C3-WROOM-02 is a general-purpose Wi-Fi and Bluetooth LE module. This module features a rich set of peripherals and high performance, which makes it an ideal choice for smart home, industrial automation, health care, consumer electronics, etc.", ki_keywords="esp32-c3 module", Reference=U, Source=NodeController.SCHLIB

## Free pads (board coordinates)
  round 6 hole 3.2: 3(4,33) 3(51,4) 3(51,33)

## Via types
v1: diameter 0.508, hole 0.254, Top Layer to Bottom Layer, 131 vias
v2: diameter 1.016, hole 0.508, Top Layer to Bottom Layer, 6 vias

## Nets (pads, with @x,y where several pads share a name; then routed paths per layer and width w, separated by ;. In a path a pad name is that pad's centre, name@x,y a point inside that pad or via, vN(x,y) a via of type N, cw(c..) or ccw(c..) an arc to the next point about the centre after c; other vN are vias at no path point)
+3.3V: C10.2 C13.2 C14.2 J3.2 J5.9 R4.2 R6.2 R7.2 U3.5 U4.1 | length 64.1
  Top Layer w0.508: J5.9@1.397,3.048 1.397,3.343 0.996,3.745 U4.1 1.026,6.746 1.026,8.011 2.359,9.344 6.804,9.344 14.351,16.891 C13.2 C14.2 17.834,16.945 21.009,16.945 v2(21.082,17.018) 21.082,22.397 21.432,22.747 R4.2 21.525,22.809 23.778,22.809 C10.2@23.974,22.613 ; R7.2 19.842,7.142 21.112,7.142 v2(21.209,7.239) 22.352,7.239 23.376,6.215 J3.2 31.377,6.215 32.131,5.461 R6.2 ; C10.2@24.242,22.871 24.242,24.824 U3.5
  Bottom Layer w0.508: v2(21.082,17.018) 21.082,9.762 21.209,9.635 v2(21.209,7.239)
+5.0V: C3.1 C4.1 C5.2 C6.1 C9.1 J5.8 R5.2 U1.3 U2.3 U3.1 | length 73.1
  Top Layer w0.508: v2(22.225,10.033) 23.241,11.049 24.384,11.049 26.417,13.082 26.417,14.352 ; C3.1 23.387,33.255 C3.1@23.876,33.255 ; U2.3 U2.3 26.417,14.352 ; C4.1 25.889,33.255 C3.1@23.876,33.255 ; C4.1@25.971,33.191 28.404,33.191 C5.2 ; U3.1 28.604,24.831 28.919,25.146 28.919,22.95 27.305,21.336 27.305,18.923 C6.1 27.432,15.367 26.417,14.352 ; C5.2@28.448,33.191 30.817,33.191 U1.3 ; C9.1@28.797,25.273 28.797,28.96 R5.2 28.674,30.508 27.813,31.369 24.174,31.369 23.876,31.667 C3.1@23.876,33.255 ; U1.3@33.465,30.924 U1.3@33.655,30.734
  Bottom Layer w0.508: J5.8 3.999,2.859 3.999,2.151 4.651,1.499 19.406,1.499 20.32,2.413 20.32,3.644 22.479,5.803 22.479,9.642 22.225,9.896 v2(22.225,10.033)
+24V: C1.2 C2.2 J1.1 J2.3B J2.3T J2.4B J2.4T J2.5B J2.5T U1.1 | length 28.1
  Top Layer w0.508: J1.1 43.284,34.521 41.252,34.521 38.479,31.748 38.479,30.859 U1.1 38.477,30.734 39.493,29.718 C1.2 C2.2@46.507,29.718 ; J2.5B 47.498,21.04 47.498,27.432 46.863,28.067 46.863,29.326 C2.2
CAN_N: D1.2 J2.2B J2.2T R3.2 U2.6 | length 38.9
  Top Layer w0.254: U2.6 30.193,14.351 30.366,14.524 30.366,14.583 30.515,14.732 31.021,14.732 31.028,14.725 31.886,14.725 32.035,14.576 32.035,14.433 32.512,13.956 R3.2 32.766,13.956 33.243,14.433 33.243,14.576 33.392,14.725 33.954,14.725 35.129,15.899 35.129,20.397 36.702,21.971 38.267,21.971 38.342,21.896 38.622,21.896 J2.2T@38.697,21.971 ; J2.2T J2.2T@38.697,21.971 ; D1.2 41.327,8.824 41.5,8.651 41.5,8.277 41.649,8.128 41.86,8.128 42.719,8.987 42.719,12.705 43.274,13.26 43.274,15.104 J2.2B 44.32,15.325 44.469,15.474 44.469,15.684 43.727,16.426 42.419,16.426 41.25,17.595 41.25,20.953 39.39,22.813 38.363,22.813 38.215,22.664 38.215,22.453 J2.2T@38.697,21.971
CAN_P: D1.1 J2.1B J2.1T R2.2 U2.7 | length 38.9
  Top Layer w0.254: U2.7 30.193,15.621 30.366,15.448 30.366,15.389 30.515,15.24 31.231,15.24 31.238,15.233 31.886,15.233 32.035,15.382 32.035,15.525 32.512,16.002 R2.2 32.766,16.002 33.243,15.525 33.243,15.382 33.392,15.233 33.744,15.233 34.621,16.11 34.621,20.905 J2.1T@36.534,22.818 ; J2.1T@36.58,22.818 J2.1T 36.765,22.945 37.188,23.368 39.553,23.368 41.758,21.163 41.758,17.805 42.629,16.934 43.937,16.934 44.977,15.895 44.977,14.763 45.593,14.146 J2.1B ; D1.1 41.327,6.924 41.5,7.097 41.5,7.471 41.649,7.62 42.07,7.62 43.227,8.777 43.227,11.689 J2.1B@45.506,13.968
CAN_RX: U2.4 U4.6 | length 20.7
  Top Layer w0.508: U4.6 8.496,8.623 14.351,14.478 20.828,14.478 22.225,13.081 U2.4
CAN_TX: U2.1 U4.5 | length 22.4
  Top Layer w0.508: U4.5 6.996,8.266 13.97,15.24 21.082,15.24 22.687,16.845 24.272,16.845 U2.1
EN: C11.2 C12.2 R6.1 S1.2 U4.2 | length 45.7
  Top Layer w0.508: v2(1.633,1.555) 1.649,1.571 2.289,1.571 2.518,1.8 2.518,6.694 U4.2 ; v2(29.972,1.397) 30.109,1.397 30.633,1.921 R6.1 32.181,1.971 34.875,1.971 C11.2 34.927,2.019 37.59,2.019 C12.2 37.599,2.025 40.633,2.025 S1.2
  Bottom Layer w0.508: v2(1.633,1.555) 2.36,1.555 3.026,0.889 29.327,0.889 29.835,1.397 v2(29.972,1.397)
GND: C1.1 C2.1 C3.2 C4.2 C5.1 C6.2 C7.2 C8.2 C9.2 C10.1 C11.1 C12.1 C13.1 C14.1 C15.1 D1.3 D2.1 J1.2 J2.6B J2.6T J2.7B J2.7T J2.8B J2.8T J3.1 J5.1 J5.7 J6.9 R1.2 S1.3 S2.3 U1.2 U2.2 U3.2 U4.9 U4.19
  other v1: 38.989,0.889 47.498,0.889 43.053,1.016 21.082,1.677 23.368,1.677 26.543,1.778 7.62,2.287 23.368,2.794 26.543,3.048 23.368,4.191 3.81,4.572 15.113,4.826 29.718,4.826 18.542,5.08 13.843,5.207 43.815,5.207 12.065,5.334 37.592,5.334 34.925,5.588 21.209,6.096 13.97,6.731 47.752,6.731 53.721,7.112 28.956,7.239 32.512,7.239 24.765,7.366 37.338,7.874 12.954,8.128 44.196,8.255 26.924,8.382 10.16,8.509 23.368,8.509 18.034,8.636 12.954,9.271 31.877,10.033 25.146,10.287 1.397,10.541 41.656,10.541 5.08,10.668 53.848,11.049 18.161,11.557 13.589,11.684 22.098,11.684 45.593,12.065 18.161,13.208 36.449,13.208 41.021,14.224 6.096,14.351 7.112,14.351 8.255,14.351 1.524,14.478 22.606,15.24 5.08,15.367 9.271,15.367 26.162,15.621 53.594,15.875 48.006,16.129 11.684,16.256 5.08,16.383 9.271,16.383 41.021,16.637 5.08,17.526 9.271,17.526 1.524,18.415 6.096,18.542 7.239,18.542 8.255,18.542 24.13,18.796 48.133,19.431 53.848,19.558 15.367,19.939 17.145,20.447 28.321,20.447 26.035,20.828 22.352,20.955 19.812,21.082 15.24,21.59 48.895,21.59 43.942,21.717 4.826,22.479 1.496,22.523 8.1,22.523 11.529,22.523 30.226,22.86 17.399,23.495 48.895,23.749 14.986,23.876 45.466,23.876 54.102,24.003 32.639,24.13 35.052,24.13 39.116,24.384 43.053,24.892 25.019,25.781 48.895,26.162 20.574,26.797 27.813,27.051 30.734,27.178 42.164,27.94 44.704,27.94 54.102,28.194 23.368,28.448 38.989,28.829 35.814,29.083 51.689,29.337 12.827,29.972 17.78,29.972 7.62,30.099 24.892,30.099 21.463,30.353 0.889,30.607 48.006,30.607 30.607,30.988 41.275,32.385 35.687,32.512 46.482,33.02 32.893,33.909 38.608,34.036 21.971,34.798 1.016,35.814 30.353,35.941 40.386,35.941 48.006,35.941 12.827,36.068 35.687,36.068 45.593,36.068 5.969,36.195 25.146,36.195 27.559,36.195 9.398,36.322 17.145,36.322
GPIO0: J6.1 U4.18 | length 4.4
  Top Layer w0.508: U4.18 1.133,24.353 1.133,28.311 J6.1 ; J6.1@1.333,28.384 J6.1@1.397,28.448
GPIO1: J6.2 U4.17 | length 4.9
  Top Layer w0.508: U4.17 2.496,27.134 J6.2 ; J6.2@3.873,28.384 J6.2@3.937,28.448
GPIO2: J6.3 U4.16 | length 5.3
  Top Layer w0.508: U4.16 3.996,26.094 J6.3 ; J6.3@6.413,28.384 J6.3@6.477,28.448
GPIO3: J6.4 U4.15 | length 6
  Top Layer w0.508: U4.15 5.496,25.689 8.046,28.239 8.681,28.239 J6.4
GPIO4: J5.6 U4.3 | length 7.1
  Top Layer w0.508: U4.3 4.16,6.552 4.16,5.619 5.461,4.318 7.747,4.318 J5.6@9.017,3.048
GPIO5: J3.4 J5.5 U4.4 | length 27.2
  Top Layer w0.508: U4.4 5.692,6.52 5.692,5.611 6.223,5.08 9.271,5.08 11.303,3.048 11.557,3.048 11.557,2.921 13.97,0.508 23.749,0.508 24.892,1.651 24.892,3.429 25.678,4.215 J3.4
GPIO8: J5.4 R7.1 U4.7 | length 15.7
  Top Layer w0.508: U4.7 10.145,6.567 10.145,5.603 11.303,4.445 12.573,4.445 J5.4 15.621,1.397 17.145,1.397 17.685,1.937 R7.1
GPIO9: C15.2 J5.3 S2.2 U4.8 | length 14.7
  Top Layer w0.508: U4.8@11.657,6.555 U4.8 11.684,6.904 11.684,9.398 12.573,10.287 14.124,10.287 14.132,10.279 14.697,10.279 S2.2 15.113,9.863 15.113,8.382 15.113,8.126 15.365,7.874 16.039,7.874 16.51,7.403 J5.3
GPIO10: J3.3 J5.2 U4.10 | length 34.6
  Top Layer w0.508: U4.10 13.192,24.02 13.192,23.031 13.49,22.733 16.637,22.733 19.431,19.939 v2(19.431,18.161) ; J5.2 21.217,5.215 J3.3
  Bottom Layer w0.508: J5.2 19.259,3.257 19.259,3.892 19.431,4.064 v2(19.431,18.161)
GPIO18: J6.6 U4.13 | length 7.9
  Top Layer w0.508: U4.13 8.668,24.388 8.668,25.305 10.414,27.051 12.7,27.051 J6.6@14.097,28.448
GPIO19: J6.5 U4.14 | length 6.5
  Top Layer w0.508: U4.14 7.192,24.412 7.192,24.718 10.713,28.239 11.221,28.239 J6.5 ; J6.5@11.493,28.384 J6.5@11.557,28.448
NetC7_1: C7.1 R2.1 | length 2.7
  Top Layer w0.508: R2.1 C7.1
NetC8_1: C8.1 R3.1 | length 4.2
  Top Layer w0.508: C8.1 30.353,10.922 31.383,11.952 R3.1
NetD2_2: D2.2 R4.1 | length 2.3
  Top Layer w0.508: D2.2 19.184,24.758 21.456,24.758 R4.1
NetR1_1: R1.1 U2.8 | length 1.9
  Top Layer w0.508: 29.718,17.191 R1.1@29.718,19.05
NetR5_1: R5.1 U3.3 | length 2.5
  Top Layer w0.508: U3.3 26.639,26.731 26.67,26.762 R5.1
RXD: J6.8 U4.11 | length 9.9
  Top Layer w0.508: U4.11 11.692,24.412 11.692,25.229 11.99,25.527 16.256,25.527 J6.8@19.177,28.448
TXD: J6.7 U4.12 | length 8.9
  Top Layer w0.508: U4.12 10.18,24.4 10.18,25.293 11.176,26.289 14.478,26.289 J6.7@16.637,28.448
pads on no net: FD1.0 FD2.0 FD3. J2. J3.5 J3.6 S1.1 S1.4 S2.1 S2.4 U2.5 U3.4

## Polygon pours and split planes (outlines as drawn)
GND on Top Layer "Top GND" (solid, remove dead copper, pour order 14): -0.126,0.021 -0.127,37 cw(c0,37) 0,37.127 55.372,37.127 55.384,37.127 cw(c55.396,37) 55.523,37 55.499,0 cw(c55.372,0) 55.372,-0.127 0,-0.127 cw(c0,0)
GND on Bottom Layer "Bottom GND" (solid, remove dead copper, pour order 13): -0.126,0.021 -0.127,37 cw(c0,37) 0,37.127 55.372,37.127 55.384,37.127 cw(c55.396,37) 55.523,37 55.499,0 cw(c55.372,0) 55.372,-0.127 0,-0.127 cw(c0,0)
+24V on Bottom Layer "+24V 5A" (solid, pour order 11): 35.188,21.697 35.188,16.246 39.179,17.519 41.411,17.379 46.11,14.712 47.253,15.855 47.253,19.834 46.043,20.574 44.593,20.574 43.787,19.284 40.776,19.284 38.871,21.697

## Keep-outs
Keep-Out Layer:
  the board outline again, w0.254

## Silkscreen, mask and mechanical layers (free items; w line width, h text height)
Top Overlay:
  text "N.C. V2 R0" at 8.001,34.798 h1.27
  text "+" at 43.51,32.546 h1.02
  text "3" at 8.585,30.048 h1.02
  text "19" at 10.744,30.048 h1.02
  text "18" at 13.284,30.048 h1.02
  text "TX" at 15.57,30.048 h1.02
  text "RX" at 18.237,30.048 h1.02
  text "GND" at 20.396,30.048 h1.02
  text "0" at 0.838,25.857 h1.02
  text "1" at 3.759,25.857 h1.02
  text "2" at 5.918,25.857 h1.02
  text "PWR" at 15.316,24.333 h1.02
  text "BOOT" at 16.713,14.427 h1.02
  text "RST" at 42.137,6.599 h1.02
  text "3V" at 0.33,0.457 h1.02
  text "5V" at 2.997,0.457 h1.02
  text "GND" at 5.156,0.457 h1.02
  text "4" at 8.712,0.457 h1.02
  text "5" at 11.125,0.457 h1.02
  text "8" at 13.665,0.457 h1.02
  text "9" at 16.205,0.457 h1.02
  text "10" at 18.237,0.457 h1.02
  text "GND" at 20.396,0.457 h1.02
Bottom Overlay:
  drawing of 24 lines, arcs and shapes, not listed
  text "Node Controller V2 Rev 0" at 35.433,35.052 h1.02
  text "Project FishWorks - 2024" at 35.433,33.359 h1.02
  text "JLC PCB" at 31.877,31.242 h1.02
  text "JLCJLCJLCJLC" at 11.989,6.299 h0.76
Mechanical 1:
  the board outline again, w0.15